# Altium PCB PCB1.PcbDoc (part 2 of 2)
Units mm, origin at the board's own origin, x right, y up, seen from the top; angles counter-clockwise.
Board outline 126.06 x 70 mm, 2 copper layers (Top Layer, Bottom Layer); 146 components, 103 nets, 443 pads, 623 vias.
Unrouted connection lines stored in the file: 85.
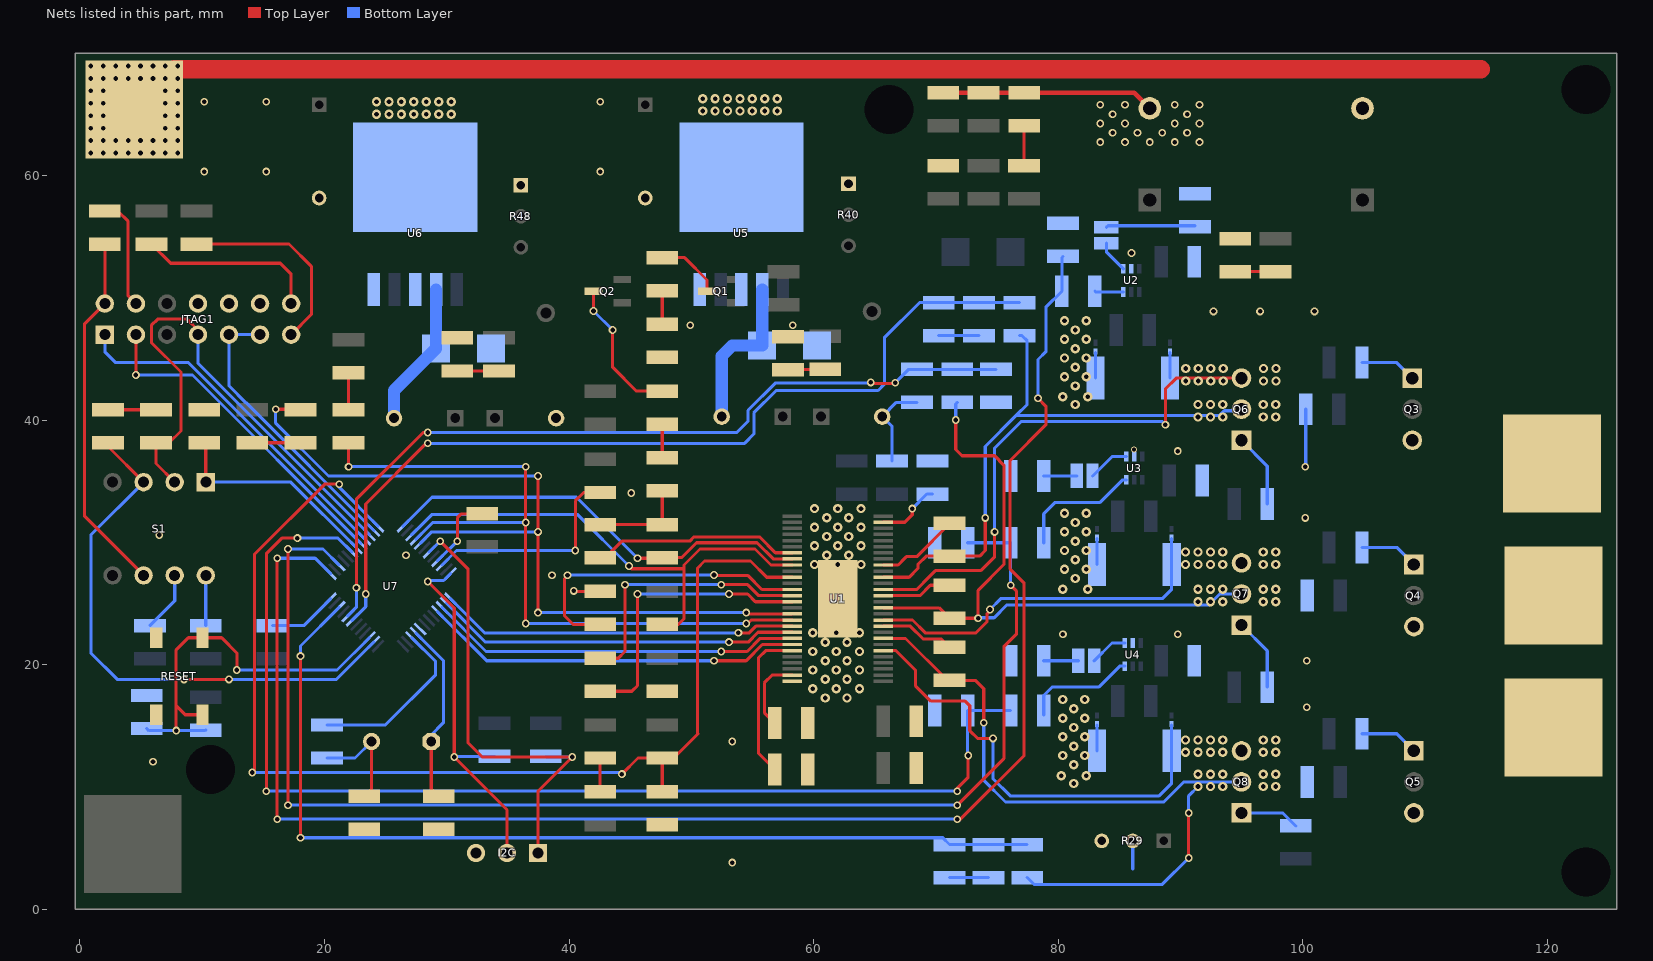
[diagram p2: the nets of this part, all layers, seen from the top]

## Via types
v1: diameter 0.762, hole 0.381, Top Layer to Bottom Layer, 368 vias
v2: diameter 0.635, hole 0.381, Top Layer to Bottom Layer, 254 vias
v3: diameter 0.5, hole 0.3, Top Layer to Bottom Layer, 1 vias

## Nets (pads, with @x,y where several pads share a name; then routed paths per layer and width w, separated by ;. In a path a pad name is that pad's centre, name@x,y a point inside that pad or via, vN(x,y) a via of type N, cw(c..) or ccw(c..) an arc to the next point about the centre after c; other vN are vias at no path point) (continued)
GND: C1.2 C2.2 C4.2 C8.2 C9.2 C10.2 C11.2 C12.2 C13.2 C17.2 C18.1 C19.1 C20.2 C21.1 C22.1 C23.1 C24.2 C25.1 C26.2 C27.2 C28.2 C29.2 C30.2 C31.2 C32.2 C33.2 C34.2 C35.2 C36.1 C37.1 C38.2 C39.1 D3.1 D4.2 D6.2 D7.1 D8.2 GND.1 I2C.3 J4.2 J5.2 J6.2 JTAG1.4 JTAG1.8 JTAG1.10 JTAG1.12 R1.1 R4.1 R5.1 R6.1 R7.1 R8.2 R13.1 R14.1 R15.1 R22.1 R23.1 R24.1 R26.1 R27.1 R29.3 R31.1 R32.1 R34.1 R37.1 R40.1 R41.2 R42.1 R43.1 R44.1 R48.1 R53.1 RESET.1 RESET.2 U1.28 U1.57 U2.2 U3.2 U4.2 U5.3 U5.5 U5.6 U6.3 U6.5 U6.6 U7.12 U7.33 U7.44 | length 191.8
  Top Layer w0.254: R41.2@2.032,57.103 3.095,57.103 3.937,56.261 3.937,50.165 JTAG1.4@4.572,49.53 ; R44.1@2.286,40.847 R43.1@6.223,40.847 ; v2(30.861,30.099) 30.861,32.004 31.195,32.338 C38.2@32.893,32.338 ; v2(40.386,26.035) 40.433,25.988 C4.2@42.545,25.988 ; R7.1@42.545,9.605 R6.1@42.545,12.366 ; R5.1@42.545,31.449 R13.1@47.625,31.449 R4.1@47.625,34.21
  Top Layer w0.381: C33.2@70.603,66.786 C32.2@73.905,66.786 C34.2@77.232,66.786 86.211,66.786 C30.2@87.494,65.503
  Top Layer w1.5: GND.1@4.445,65.405 7.747,68.707 114.554,68.707
  Bottom Layer w0.254: C35.2@15.748,23.194 18.299,23.194 U7.12@20.497,25.392 ; U7.33@29.244,28.499 30.843,30.099 v2(30.861,30.099) ; C10.2@66.421,36.656 66.421,39.479 C27.2@65.61,40.29 66.769,41.449 C20.2@68.453,41.449 ; C17.2@70.231,46.91 R26.1@73.533,46.91 ; C24.2@71.12,2.587 R37.1@74.295,2.587 ; R22.1@83.056,43.434 J4.2@83.056,45.54 ; R24.1@83.183,12.954 J6.2@83.183,15.06 ; R23.1@83.183,28.194 J5.2@83.183,30.3 ; v2(100.203,36.195) 100.25,36.148 C11.2@100.25,40.894
  other v1: 81.28,10.287 80.264,10.922 82.296,10.922 81.28,11.811 80.391,12.573 82.169,12.573 81.28,13.335 80.391,14.097 82.169,14.097 81.28,14.859 80.391,15.621 82.169,15.621 81.28,16.383 80.391,17.145 82.169,17.145 60.96,17.272 62.738,17.272 59.944,18.034 61.849,18.034 63.754,18.034 60.96,18.796 62.738,18.796 59.944,19.558 61.849,19.558 63.754,19.558 60.96,20.32 62.738,20.32 59.944,21.082 61.849,21.082 63.754,21.082 60.96,21.844 62.738,21.844 59.944,22.606 61.849,22.606 63.754,22.606 80.391,26.162 82.423,26.162 81.407,27.051 80.518,27.813 82.296,27.813 60.071,28.194 61.976,28.194 63.881,28.194 81.407,28.575 61.087,28.956 62.865,28.956 80.518,29.337 82.296,29.337 60.071,29.718 61.976,29.718 63.881,29.718 81.407,30.099 61.087,30.48 62.865,30.48 80.518,30.861 82.296,30.861 60.071,31.242 61.976,31.242 63.881,31.242 81.407,31.623 61.087,32.004 62.865,32.004 80.518,32.385 82.296,32.385 60.071,32.766 61.976,32.766 63.881,32.766 81.407,41.275 80.391,41.91 82.423,41.91 81.407,42.799 80.518,43.561 82.296,43.561 81.407,44.323 80.518,45.085 82.296,45.085 81.407,45.847 80.518,46.609 82.296,46.609 81.407,47.371 80.518,48.133 82.296,48.133 0.889,61.849 1.905,61.849 2.921,61.849 3.937,61.849 4.953,61.849 5.969,61.849 6.985,61.849 8.001,61.849 0.889,62.865 1.905,62.865 2.921,62.865 3.937,62.865 4.953,62.865 5.969,62.865 6.985,62.865 8.001,62.865 0.889,63.881 1.905,63.881 6.985,63.881 8.001,63.881 0.889,64.897 1.905,64.897 6.985,64.897 8.001,64.897 24.257,65.024 25.273,65.024 26.289,65.024 27.305,65.024 28.321,65.024 29.337,65.024 30.353,65.024 50.927,65.278 51.943,65.278 52.959,65.278 53.975,65.278 54.991,65.278 56.007,65.278 57.023,65.278 0.889,65.913 1.905,65.913 6.985,65.913 8.001,65.913 24.257,66.04 25.273,66.04 26.289,66.04 27.305,66.04 28.321,66.04 29.337,66.04 30.353,66.04 50.927,66.294 51.943,66.294 52.959,66.294 53.975,66.294 54.991,66.294 56.007,66.294 57.023,66.294 0.889,66.929 1.905,66.929 6.985,66.929 8.001,66.929 0.889,67.945 1.905,67.945 2.921,67.945 3.937,67.945 4.953,67.945 5.969,67.945 6.985,67.945 8.001,67.945 0.889,68.961 1.905,68.961 2.921,68.961 3.937,68.961 4.953,68.961 5.969,68.961 6.985,68.961 8.001,68.961
  other v2: 53.34,3.81 5.969,12.065 53.34,13.716 100.33,16.51 100.33,20.32 80.391,22.479 89.789,22.479 38.608,27.305 26.67,28.956 6.477,30.607 100.203,32.004 45.085,34.036 89.789,37.465 49.911,47.752 58.293,47.752 92.71,48.895 96.52,48.895 100.965,48.895 86.004,53.67 10.16,60.325 15.24,60.325 42.545,60.325 83.439,62.738 85.471,62.738 87.503,62.738 89.535,62.738 91.567,62.738 84.455,63.5 86.487,63.5 88.519,63.5 90.551,63.5 83.439,64.262 85.471,64.262 89.535,64.262 91.567,64.262 84.455,65.024 90.551,65.024 83.439,65.786 85.471,65.786 89.535,65.786 91.567,65.786 10.16,66.04 15.24,66.04 42.545,66.04
  other v3: 86.208,37.592
GPIO0: GPIO2.2 U1.17 U7.29 | length 68.5
  Top Layer w0.254: v2(16.002,40.894) 17.987,40.894 GPIO2.2@18.034,40.847 ; v2(37.465,24.257) v2(37.465,30.861) v2(37.465,35.433) ; v2(54.483,24.257) 54.582,24.158 U1.17@58.248,24.158
  Bottom Layer w0.254: v2(16.002,40.894) 16.002,39.751 20.32,35.433 v2(37.465,35.433) ; U7.29@27.825,29.918 28.767,30.861 v2(37.465,30.861) ; v2(37.465,24.257) v2(54.483,24.257)
GPIO1: GPIO1.2 U1.18 U7.28 | length 60.6
  Top Layer w0.254: v2(21.971,36.195) GPIO1.2@21.971,38.147 ; v2(36.449,23.368) v2(36.449,31.623) v2(36.449,36.195) ; v2@54.61,23.368 54.892,23.65 U1.18@58.256,23.65
  Bottom Layer w0.254: v2(21.971,36.195) v2(36.449,36.195) ; U7.28@27.483,30.26 28.847,31.623 v2(36.449,31.623) ; v2(36.449,23.368) v2(54.483,23.368)
GPIO34: R42.2 S1.1 U7.19 | length 17.8
  Top Layer w0.254: R42.2@10.16,38.147 10.287,38.02 S1.1@10.287,34.925
  Bottom Layer w0.254: S1.1@10.287,34.925 17.25,34.925 U7.19@22.616,29.559
JTAG_TRST: JTAG1.2 R41.1 S1.6 | length 29.8
  Top Layer w0.254: R41.1@2.032,54.403 JTAG1.2@2.032,49.53 0.381,47.879 0.381,32.131 S1.6@5.207,27.305
M_OC/SDI: R9.1 U1.9 U7.27 | length 41.1
  Top Layer w0.254: v2(44.9,28.067) 45.12,27.847 49.369,27.847 49.403,27.813 ; R9.1@47.625,23.288 48.942,23.288 49.403,23.749 49.403,27.813 ; U1.9@58.256,28.15 56.516,28.15 55.202,29.464 50.715,29.464 49.403,28.152 49.403,27.813
  Bottom Layer w0.254: U7.27@27.124,30.619 28.798,32.293 40.675,32.293 v2(44.9,28.067)
M_PWM/\SCS: R13.2 U1.8 U7.25 | length 36
  Top Layer w0.254: v2(45.593,28.702) 47.578,28.702 R13.2@47.625,28.749 49.196,28.749 50.419,29.972 55.372,29.972 56.694,28.65 U1.8@58.256,28.65
  Bottom Layer w0.254: U7.25@26.424,31.319 28.794,33.69 40.605,33.69 v2(45.593,28.702)
NetC3_1: C3.1 U1.14 | length 21.8
  Top Layer w0.254: C3.1@42.545,20.527 44.022,20.527 44.577,21.082 v2@44.577,26.289 ; v2@44.577,26.416 v2(44.577,26.543) ; v2(52.451,26.543) 54.61,26.543 55.503,25.65 U1.14@58.256,25.65
  Bottom Layer w0.254: v2@44.577,26.416 v2(44.577,26.543) v2(52.451,26.543)
NetC3_2: C3.2 U1.15 | length 23.7
  Top Layer w0.254: C3.2@42.545,17.827 45.132,17.827 45.593,18.288 v2(45.593,25.781) ; v2(53.086,25.781) 54.61,25.781 55.241,25.15 U1.15@58.256,25.15
  Bottom Layer w0.254: v2(45.593,25.781) v2(53.086,25.781)
NetC4_1: C4.1 U1.13 | length 25.5
  Top Layer w0.254: v2(39.878,27.305) 39.624,27.051 39.624,24.003 40.339,23.288 C4.1@42.545,23.288 ; v2(51.85,27.329) 51.874,27.305 54.61,27.305 55.765,26.15 U1.13@58.256,26.15
  Bottom Layer w0.254: v2@39.902,27.329 v2(51.85,27.329)
NetC5_1: C5.1 U1.48 | length 6.9
  Top Layer w0.254: U1.48@65.696,28.15 66.91,28.15 67.199,28.439 67.199,28.446 67.591,28.838 68.437,28.838 71.12,31.521 C5.1@71.12,31.576
NetC6_1: C6.1 U1.43 | length 5.8
  Top Layer w0.254: U1.43@65.696,25.65 68.703,25.65 69.549,26.496 C6.1@71.12,26.496
NetC7_1: C7.1 U1.38 | length 6.1
  Top Layer w0.254: U1.38@65.696,23.15 67.909,23.15 68.961,22.098 70.438,22.098 C7.1@71.12,21.416
NetC8_1: C8.1 U1.27 | length 6.2
  Top Layer w0.254: C8.1@56.816,15.24 55.978,16.078 55.978,18.513 56.615,19.15 U1.27@58.256,19.15
NetC9_1: C9.1 U1.23 | length 12.7
  Top Layer w0.254: C9.1@56.816,11.43 55.499,12.747 55.499,20.574 56.075,21.15 U1.23@58.256,21.15
NetC18_2: C18.2 R28.1 U7.13 | length 133.2
  Top Layer w0.254: v2(16.129,7.366) v2(16.129,28.702) ; v2(71.755,7.366) 71.882,7.239 77.216,12.573 77.216,26.67 76.073,27.813 76.073,36.703 78.994,39.624 78.994,41.148 v2(78.359,41.783)
  Bottom Layer w0.254: v2(16.129,7.366) v2(71.755,7.366) ; v2(16.129,28.702) 19.235,28.702 U7.13@20.497,27.44 ; v2(78.359,41.783) 78.359,44.958 78.994,45.593 78.994,49.229 R28.1@80.311,50.546 80.311,53.307 C18.2@80.391,53.387
NetC21_2: C21.2 R33.1 U7.15 | length 107.6
  Top Layer w0.254: v2(17.018,8.509) v2(17.018,29.464) ; v2(71.755,8.509) 75.565,12.319 75.565,21.463 76.581,22.479 76.581,26.035 v2(76.12,26.496)
  Bottom Layer w0.254: v2(17.018,8.509) v2(71.755,8.509) ; v2(17.018,29.464) 19.873,29.464 U7.15@21.197,28.14 ; C21.2@72.597,29.972 R33.1@76.12,29.972 v2(76.12,26.496)
NetC23_2: C23.2 R36.1 U7.18 | length 94.6
  Top Layer w0.254: v2(15.24,9.652) 15.24,29.083 16.51,30.353 v2(17.78,30.353) ; v2(71.755,9.652) 71.628,9.779 72.644,10.795 v2(72.644,12.573)
  Bottom Layer w0.254: v2(15.24,9.652) v2(71.755,9.652) ; v2(17.78,30.353) 21.104,30.353 U7.18@22.257,29.2 ; v2(72.644,12.573) 72.597,12.62 C23.2@72.597,16.256 R36.1@76.12,16.256
NetC34_1: C34.1 R51.1 | length 3.2
  Top Layer w0.254: R51.1@77.207,60.817 C34.1@77.207,64.061
NetC36_2: C36.2 R54.2 Y1.2 | length 9
  Top Layer w0.254: C36.2@23.241,9.224 23.849,9.832 Y1.2@23.849,13.716
  Bottom Layer w0.254: R54.2@20.193,12.366 22.499,12.366 Y1.2@23.849,13.716
NetD1_1: D1.1 R1.2 | length 2.8
  Top Layer w0.254: R1.2@47.625,47.832 D1.1@47.625,50.593
NetD1_2: D1.2 Q1.3 | length 5.3
  Top Layer w0.254: D1.2@47.625,53.293 49.45,53.293 51.276,51.467 Q1.3@51.276,50.546
NetD2_1: D2.1 R4.2 | length 2.8
  Top Layer w0.254: R4.2@47.625,36.91 D2.1@47.625,39.671
NetD2_2: D2.2 Q2.3 | length 11.7
  Top Layer w0.254: v2(42.005,48.927) Q2.3@42.005,50.546 ; v2(43.561,47.371) 43.561,44.323 45.513,42.371 D2.2@47.625,42.371
  Bottom Layer w0.254: v2(42.005,48.927) v2(43.561,47.371)
NetD3_2: D3.2 L1.2 U5.2 | length 13.2
  Bottom Layer w1: L1.2@52.482,40.29 52.482,45.243 53.34,46.101 D3.2@55.789,46.101 ; D3.2@55.795,46.107 U5.2@55.795,50.679
NetD4_1: D4.1 R47.1 | length 3.4
  Top Layer w0.254: D4.1@57.522,44.147 R47.1@60.951,44.147
NetD6_1: D6.1 R49.1 | length 3.3
  Top Layer w0.254: D6.1@94.479,52.148 R49.1@97.781,52.148
NetD7_2: D7.2 L2.2 U6.2 | length 11.9
  Bottom Layer w1: L2.2@25.685,40.163 25.685,42.413 D7.2@29.119,45.847 29.125,45.853 U6.2@29.125,50.679
NetD8_1: D8.1 R52.1 | length 3.4
  Top Layer w0.254: D8.1@30.852,44.02 R52.1@34.281,44.02
NetD9_1: GPIO2.1 R57.1 | length 3.9
  Top Layer w0.254: R57.1@14.097,38.147 GPIO2.1@18.034,38.147
NetD10_1: GPIO1.1 R58.1 | length 3
  Top Layer w0.254: GPIO1.1@21.971,40.847 R58.1@21.971,43.862
NetI2C_1: I2C.1 R12.1 U7.31 | length 38.9
  Top Layer w0.254: v2(29.464,30.099) 31.75,27.813 31.75,13.589 32.893,12.446 v2(40.259,12.446) 37.465,9.652 I2C.1@37.465,4.597
  Bottom Layer w0.254: U7.31@28.543,29.2 29.442,30.099 v2(29.464,30.099) ; R12.1@38.1,12.493 38.147,12.446 v2(40.259,12.446)
NetI2C_2: I2C.2 R59.1 U7.36 | length 30.3
  Top Layer w0.254: v2(28.448,26.797) 30.607,24.638 v2(30.607,12.446) 34.925,8.128 I2C.2@34.925,4.597
  Bottom Layer w0.254: v2(28.448,26.797) 28.532,26.881 29.745,26.881 U7.36@30.303,27.44 ; v2(30.607,12.446) 30.654,12.493 R59.1@33.909,12.493
NetJ7_1: J7.1 R27.2 | length 7.3
  Bottom Layer w0.254: J7.1@83.947,55.768 84.074,55.895 R27.2@91.186,55.895
NetJ7_2: J7.2 U2.1 | length 2.7
  Bottom Layer w0.254: J7.2@83.947,54.468 83.947,53.767 U2.1@85.329,52.385
NetJ8_1: J8.1 R32.2 | length 2.7
  Bottom Layer w0.254: R32.2@78.82,35.433 J8.1@81.519,35.433
NetJ8_2: J8.2 U3.1 | length 3.4
  Bottom Layer w0.254: J8.2@82.819,35.433 84.404,37.018 U3.1@85.583,37.018
NetJ9_1: J9.1 R34.2 | length 2.8
  Bottom Layer w0.254: R34.2@78.82,20.32 J9.1@81.646,20.32
NetJ9_2: J9.2 U4.1 | length 3.1
  Bottom Layer w0.254: J9.2@82.946,20.32 84.404,21.778 U4.1@85.456,21.778
NetJTAG1_13: JTAG1.13 R45.2 | length 16.4
  Top Layer w0.254: R45.2@9.525,54.403 17.098,54.403 18.923,52.578 18.923,48.641 JTAG1.13@17.272,46.99
NetJTAG1_14: JTAG1.14 R46.2 | length 14.9
  Top Layer w0.254: R46.2@5.842,54.403 7.413,52.832 16.383,52.832 17.272,51.943 JTAG1.14@17.272,49.53
NetQ3_1: Q3.1 R16.2 | length 4.6
  Bottom Layer w0.254: R16.2@104.855,44.704 107.696,44.704 Q3.1@108.966,43.434
NetQ4_1: Q4.1 R17.2 | length 4.8
  Bottom Layer w0.254: R17.2@104.855,29.591 107.696,29.591 Q4.1@109.093,28.194
NetQ5_1: Q5.1 R18.2 | length 4.8
  Bottom Layer w0.254: R18.2@104.855,14.351 107.696,14.351 Q5.1@109.093,12.954
NetQ6_1: Q6.1 R19.2 | length 6.1
  Bottom Layer w0.254: Q6.1@94.996,38.354 97.108,36.242 R19.2@97.108,33.147
NetQ7_1: Q7.1 R20.2 | length 6
  Bottom Layer w0.254: Q7.1@94.996,23.241 97.108,21.129 R20.2@97.108,18.161
NetQ8_1: Q8.1 R21.2 | length 4.9
  Bottom Layer w0.254: Q8.1@94.996,7.874 98.378,7.874 R21.2@99.441,6.811
NetR5_2: R5.2 U1.7 | length 17
  Top Layer w0.254: R5.2@42.545,28.749 42.973,28.749 44.323,30.099 49.869,30.099 50.221,30.451 55.57,30.451 56.871,29.15 U1.7@58.256,29.15
NetR8_1: R8.1 U1.55 | length 5.3
  Top Layer w0.254: U1.55@65.696,31.65 67.464,31.65 68.072,32.258 v2(68.072,32.766)
  Bottom Layer w0.254: v2(68.072,32.766) 69.262,33.956 R8.1@69.723,33.956
NetR28_2: R28.2 U2.6 | length 2.3
  Bottom Layer w0.254: R28.2@83.011,50.546 83.072,50.485 U2.6@85.329,50.485
NetR33_2: R33.2 U3.6 | length 10.3
  Bottom Layer w0.254: R33.2@78.82,29.972 78.82,32.338 79.756,33.274 83.439,33.274 85.283,35.118 U3.6@85.583,35.118
NetR36_2: R36.2 U4.6 | length 9.2
  Bottom Layer w0.254: R36.2@78.82,15.875 78.82,17.479 79.502,18.161 83.312,18.161 85.029,19.878 U4.6@85.456,19.878
NetR38_2: R38.2 S1.8 | length 4.1
  Bottom Layer w0.254: R38.2@10.287,23.194 S1.8@10.287,27.305
NetR39_2: R39.2 S1.7 | length 5
  Bottom Layer w0.254: R39.2@5.715,23.194 7.747,25.226 S1.7@7.747,27.305
NetR54_1: R54.1 U7.46 | length 14.4
  Bottom Layer w0.254: R54.1@20.193,15.066 24.972,15.066 29.083,19.177 29.083,20.254 U7.46@27.124,22.213
NetR56_2: R56.2 U7.34 | length 17.8
  Top Layer w0.254: v2(40.513,29.337) 40.513,33.401 41.195,34.083 R56.2@42.545,34.083
  Bottom Layer w0.254: U7.34@29.603,28.14 30.8,29.337 v2(40.513,29.337)
OC_ADJ/SCLK: R11.2 R15.2 U1.11 U7.24 | length 94.8
  Top Layer w0.254: v2(14.097,11.176) 14.259,11.338 14.259,29.016 20.006,34.764 v2(21.196,34.764) ; v2(44.323,11.049) 45.64,12.366 R11.2@47.625,12.366 ; R15.2@47.625,9.605 R11.2@47.625,12.366 ; U1.11@58.256,27.15 56.162,27.15 54.835,28.477 51.083,28.477 50.511,27.905 50.511,14.386 50.546,14.351 48.561,12.366 R11.2@47.625,12.366
  Bottom Layer w0.254: v2(14.097,11.176) 44.323,11.176 v2(44.323,11.049) ; v2(21.196,34.764) 21.196,34.499 U7.24@24.376,31.319
PWM_BH: U1.19 U7.37 | length 29.3
  Top Layer w0.254: v2(53.848,22.606) 54.737,22.606 55.281,23.15 U1.19@58.256,23.15
  Bottom Layer w0.254: U7.37@30.303,25.392 33.089,22.606 v2(53.848,22.606)
PWM_BL: U1.20 U7.38 | length 30
  Top Layer w0.254: v2(53.086,21.844) 54.652,21.844 55.458,22.65 U1.20@58.256,22.65
  Bottom Layer w0.254: U7.38@29.962,25.051 33.169,21.844 v2(53.086,21.844)
PWM_CH: U1.21 U7.39 | length 30.6
  Top Layer w0.254: v2(52.451,21.082) 54.568,21.082 55.636,22.15 U1.21@58.256,22.15
  Bottom Layer w0.254: U7.39@29.603,24.692 33.213,21.082 v2(52.451,21.082)
PWM_CL: U1.22 U7.40 | length 31.2
  Top Layer w0.254: v2(51.85,20.32) 54.483,20.32 55.813,21.65 U1.22@58.256,21.65
  Bottom Layer w0.254: U7.40@29.244,24.333 33.256,20.32 v2(51.85,20.32)
R\E\S\E\T\: C39.2 R55.1 RESET.3 RESET.4 U7.3 | length 33.2
  Top Layer w0.254: v2@7.839,14.64 7.839,16.672 ; RESET.4@10.028,15.9 8.611,15.9 7.839,16.672 ; v2(12.827,19.558) 12.827,20.955 11.582,22.2 RESET.3@10.028,22.2 8.865,22.2 7.839,21.174 7.839,16.672
  Bottom Layer w0.254: C39.2@5.461,14.779 5.635,14.605 v2(7.874,14.605) 10.24,14.605 R55.1@10.287,14.652 ; v2(12.827,19.558) 21.021,19.558 U7.3@23.676,22.213
REF_CS: pad.0@86.106,3.302 R29.2 | length 2.3
  Bottom Layer w0.254: pad.0@86.106,3.302 R29.2@86.106,5.588
SH_A: A.1 C5.2 Q3.3 Q6.2 R25.1 U1.46 | length 47.3
  Top Layer w0.254: U1.46@65.696,27.15 67.815,27.15 68.545,27.88 68.545,28.217 69.204,28.876 C5.2@71.12,28.876 73.58,28.876 74.041,29.337 v2(74.041,32.004)
  Bottom Layer w0.254: v2(74.041,32.004) 74.041,37.846 76.581,40.386 ; R25.1@76.835,46.91 77.042,46.91 77.47,46.482 77.47,41.275 76.581,40.386 ; Q6.2@94.869,40.767 93.599,40.767 93.218,40.386 76.581,40.386
  other v1: 91.44,40.259 92.456,40.259 93.472,40.259 96.774,40.259 97.79,40.259 91.44,41.275 92.456,41.275 93.472,41.275 96.774,41.275 97.79,41.275
SH_B: B.1 C6.2 Q4.3 Q7.2 R30.1 U1.41 | length 52.2
  Top Layer w0.254: U1.41@65.696,24.65 70.266,24.65 C6.2@71.12,23.796 v2(73.453,23.796) 73.453,26.082 75.565,28.194 75.565,36.322 74.803,37.084 72.136,37.084 71.628,37.592 v2(71.628,40.005)
  Bottom Layer w0.254: v2(71.628,40.005) 71.628,41.322 R30.1@71.755,41.449 ; v2(73.453,23.796) 73.498,23.841 74.768,23.841 75.819,24.892 92.329,24.892 93.218,25.781 Q7.2@94.996,25.781
  other v1: 91.44,25.146 92.456,25.146 93.472,25.146 96.774,25.146 97.79,25.146 91.44,26.162 92.456,26.162 93.472,26.162 96.774,26.162 97.79,26.162
SH_C: C7.2 C.1 Q5.3 Q8.2 R35.1 U1.36 | length 60.4
  Top Layer w0.254: U1.36@65.696,22.15 65.704,22.142 67.52,22.142 70.946,18.716 C7.2@71.12,18.716 73.232,18.716 73.914,18.034 v2(73.914,15.24) ; v2(90.678,4.191) v2(90.678,7.874)
  Bottom Layer w0.254: v2(73.914,15.24) 73.914,10.541 75.692,8.763 88.646,8.763 90.297,10.414 Q8.2@94.996,10.414 ; R35.1@77.47,2.587 78.025,2.032 88.519,2.032 v2(90.678,4.191) ; v2(90.678,7.874) 90.678,9.271 v1(91.44,10.033)
  other v1: 92.456,10.033 93.472,10.033 96.774,10.033 97.79,10.033 91.44,11.049 92.456,11.049 93.472,11.049 96.774,11.049 97.79,11.049
SL_A: J1.2 Q6.3 R22.2 U1.44 | length 45.7
  Top Layer w0.254: U1.44@65.696,26.15 68.441,26.15 69.468,27.177 69.468,27.192 69.962,27.686 73.66,27.686 74.803,28.829 v2(74.803,30.861) ; v2(88.773,39.624) 88.773,42.545 89.662,43.434 Q6.3@94.996,43.434
  Bottom Layer w0.254: v2(74.803,30.861) 74.803,37.719 76.962,39.878 88.519,39.878 v2(88.773,39.624) ; R22.2@89.156,43.434 J1.2@89.156,45.54
  other v1: 90.451,43.207 91.467,43.207 92.483,43.207 93.499,43.207 96.801,43.207 97.817,43.207 90.451,44.223 91.467,44.223 92.483,44.223 93.499,44.223 96.801,44.223 97.817,44.223
SL_B: J2.2 Q7.3 R23.2 U1.39 | length 30.1
  Top Layer w0.254: U1.39@65.696,23.65 68.086,23.65 69.13,22.606 73.279,22.606 74.168,23.495 74.168,24.13 74.422,24.384 v2(74.422,24.511)
  Bottom Layer w0.254: v2(74.422,24.511) 75.311,25.4 88.519,25.4 89.283,26.164 R23.2@89.283,28.194 J2.2@89.283,30.3
  other v1: 90.424,28.194 91.44,28.194 92.456,28.194 93.472,28.194 96.774,28.194 97.79,28.194 90.424,29.21 91.44,29.21 92.456,29.21 93.472,29.21 96.774,29.21 97.79,29.21
SL_C: J3.2 Q8.3 R24.2 U1.34 | length 37.6
  Top Layer w0.254: U1.34@65.696,21.15 66.734,21.15 68.326,19.558 68.326,18.288 69.596,17.018 72.39,17.018 72.771,16.637 72.771,14.605 73.406,13.97 v2(74.676,13.97)
  Bottom Layer w0.254: v2(74.676,13.97) 74.676,10.668 76.073,9.271 88.265,9.271 89.283,10.289 R24.2@89.283,12.954 J3.2@89.283,15.06
  other v1: 90.424,12.827 91.44,12.827 92.456,12.827 93.472,12.827 96.774,12.827 97.79,12.827 90.424,13.843 91.44,13.843 92.456,13.843 93.472,13.843 96.774,13.843 97.79,13.843
TCK: JTAG1.9 JTAG1.11 U7.23 | length 23.5
  Bottom Layer w0.254: JTAG1.11@14.732,46.99 JTAG1.9@12.192,46.99 12.192,42.799 13.567,41.424 13.589,41.424 U7.23@24.035,30.978
TDI: JTAG1.3 U7.20 | length 27.4
  Top Layer w0.254: v2(4.572,43.688) JTAG1.3@4.572,46.99
  Bottom Layer w0.254: v2(4.572,43.688) 9.206,43.688 U7.20@22.975,29.918
TDO: JTAG1.7 R43.2 S1.2 U7.22 | length 42.9
  Top Layer w0.254: S1.2@7.747,34.925 6.223,36.449 R43.2@6.223,38.147 7.286,38.147 8.255,39.116 8.255,43.942 5.842,46.355 5.842,47.752 6.35,48.26 8.763,48.26 9.652,47.371 JTAG1.7@9.652,46.99
  Bottom Layer w0.254: 9.652,44.643 U7.22@23.676,30.619 ; 9.652,44.653 JTAG1.7@9.652,46.99
TMS: JTAG1.1 U7.21 | length 29
  Bottom Layer w0.254: JTAG1.1@2.032,46.99 2.032,45.593 2.921,44.704 8.872,44.704 U7.21@23.317,30.26
TRST: R44.2 S1.3 U7.2 | length 45.5
  Top Layer w0.254: R44.2@2.286,38.147 2.286,37.846 S1.3@5.207,34.925 ; v2(8.509,18.796) v2(12.192,18.796)
  Bottom Layer w0.254: S1.3@5.207,34.925 0.889,30.607 0.889,20.955 3.048,18.796 v2(8.509,18.796) ; v2(12.192,18.796) 20.977,18.796 U7.2@24.035,21.854
VA_FB: C17.1 R25.2 R26.2 U7.7 | length 73.5
  Top Layer w0.254: v2(23.368,25.781) 23.368,33.147 28.321,38.1 v2(28.448,38.1)
  Bottom Layer w0.254: U7.7@22.257,23.632 23.368,24.743 v2(23.368,25.781) ; v2(28.448,38.1) 54.356,38.1 55.118,38.862 55.118,40.598 56.938,42.418 65.278,42.418 65.786,42.926 65.786,46.736 68.66,49.61 C17.1@70.231,49.61 R26.2@73.533,49.61 R25.2@76.835,49.61
VB_FB: C20.1 R30.2 R31.2 U7.8 | length 67.2
  Top Layer w0.254: v2(22.606,26.289) 22.606,33.528 28.067,38.989 v2(28.448,38.989) ; v2(64.677,43.087) 64.677,42.99 66.612,42.99 v2(66.675,43.053)
  Bottom Layer w0.254: U7.8@21.898,23.991 22.606,24.7 v2(22.606,26.289) ; v2(28.448,38.989) 53.721,38.989 54.639,39.907 54.639,40.796 56.896,43.053 64.643,43.053 v2(64.677,43.087) ; v2(66.675,43.053) 67.771,44.149 C20.1@68.453,44.149 R30.2@71.755,44.149 R31.2@74.93,44.149
VC_FB: C24.1 R35.2 R37.2 U7.10 | length 79.8
  Top Layer w0.254: v2(18.034,5.842) v2(18.034,20.701)
  Bottom Layer w0.254: v2(18.034,5.842) 70.565,5.842 C24.1@71.12,5.287 R37.2@74.295,5.287 R35.2@77.47,5.287 ; v2(18.034,20.701) 18.034,21.529 U7.10@21.197,24.692
X1: C37.2 U7.45 Y1.1 | length 14.9
  Top Layer w0.254: Y1.1@28.729,13.716 28.729,9.832 C37.2@29.337,9.224
  Bottom Layer w0.254: U7.45@27.483,22.572 29.718,20.338 29.718,15.24 28.729,14.251 Y1.1@28.729,13.716
pads on no net: JTAG1.6 S1.4 S1.5 U1.1 U1.2 U1.3 U1.4 U1.24 U1.25 U1.26 U1.30 U1.31 U1.32 U1.33 U1.50 U1.51 U1.52 U1.53 U1.54 U1.56 U7.4 U7.5 U7.9 U7.14 U7.16 U7.17 U7.30 U7.47

## Polygon pours and split planes (outlines as drawn)
+PVDD on Top Layer "Bottom Layer-No Net" (solid, pour order 46): 65.684,4.318 63.627,2.261 67.615,2.261
GND on Top Layer "Bottom Layer-No Net" (solid, pour order 42): 78.74,46.355 78.74,3.81 102.235,3.81 102.235,69.469 78.74,69.469
+PVDD on Top Layer "Bottom Layer-No Net" (solid, remove dead copper, pour order 35): 103.632,9.271 103.632,0.635 125.095,0.635 125.095,8.255 125.095,10.033 124.989,10.139 103.632,10.139
SH_C on Top Layer "Bottom Layer-No Net" (solid, remove dead copper, pour order 53): 125.222,10.033 124.714,9.525 120.777,9.525 116.332,5.08 103.124,5.08 102.489,5.08 98.298,9.271 93.726,9.271 93.726,11.684 98.298,11.684 98.425,11.684 106.299,19.558 115.697,19.558
SH_A on Top Layer "Bottom Layer-No Net" (solid, remove dead copper, pour order 39): 115.697,41.148 113.792,39.243 107.061,39.243 103.124,39.243 102.616,39.751 102.489,39.878 102.489,41.275 102.489,41.402 101.981,41.91 90.297,41.91 90.297,39.751 97.79,39.751 98.298,39.751 98.806,39.243 106.426,31.623 115.697,31.623
SH_A on Top Layer "Bottom Layer-No Net" (solid, remove dead copper, pour order 54): 98.298,41.91 102.743,46.355 110.363,46.355 112.141,46.355 117.348,41.148 113.538,37.338 103.886,37.338
SH_B on Top Layer "Bottom Layer-No Net" (solid, remove dead copper, pour order 43): 94.107,26.924 102.362,26.924 102.997,26.924 106.426,30.353 115.697,30.353 115.697,20.828 106.426,20.828 106.172,20.828 102.235,24.765 94.107,24.765
SH_B on Top Layer "Bottom Layer-No Net" (solid, pour order 47): 102.235,26.924 102.997,26.924 106.426,30.353
SH_B on Top Layer "Bottom Layer-No Net" (solid, pour order 48): 98.298,24.765 102.235,20.828 106.172,20.828 102.235,24.765
SH_B on Top Layer "Bottom Layer-No Net" (solid, pour order 51): 98.552,26.924 101.981,30.353 106.426,30.353 102.743,26.67
SH_A on Top Layer "Bottom Layer-No Net" (solid, pour order 52): 115.58,41.031 115.697,41.148 115.697,40.982
SH_C on Top Layer "Bottom Layer-No Net" (solid, pour order 55): 125.172,9.983 125.222,10.033 125.172,10.083
SH_A on Top Layer "Bottom Layer-No Net" (solid, pour order 56): 98.365,41.977 98.368,41.971 98.368,41.859 98.196,41.859
+PVDD on Top Layer "Bottom Layer-No Net" (solid, pour order 44): 64.897,9.779 65.659,9.017 65.706,9.017 65.786,9.017 66.548,9.779
GND on Bottom Layer "Bottom Layer-No Net" (solid, pour order 41): 78.74,46.355 78.74,3.81 102.235,3.81 102.235,69.469 78.74,69.469
+PVDD on Bottom Layer "Bottom Layer-No Net" (solid, pour order 37): 125.095,10.033 125.095,62.23 124.46,62.865 111.125,62.865 110.49,62.23 110.49,58.674 110.49,9.906
+PVDD on Bottom Layer "Bottom Layer-No Net" (solid, pour order 33): 103.632,9.271 103.632,0.635 125.095,0.635 125.095,8.255 125.095,10.033 124.989,10.139 103.632,10.139
+PVDD on Bottom Layer "Bottom Layer-No Net" (solid, remove dead copper, pour order 32): 108.077,11.43 103.632,11.43 103.632,9.271 114.427,9.271 114.808,9.652 114.808,11.684 114.808,18.034 110.617,18.034 110.617,11.684 110.363,11.43
+PVDD on Bottom Layer "Bottom Layer-No Net" (solid, remove dead copper, pour order 31): 108.077,26.67 103.632,26.67 103.632,24.511 114.427,24.511 114.808,24.892 114.808,26.924 114.808,33.274 110.617,33.274 110.617,26.924 110.363,26.67
+PVDD on Bottom Layer "Bottom Layer-No Net" (solid, remove dead copper, pour order 30): 107.95,41.91 103.505,41.91 103.505,39.751 114.3,39.751 114.681,40.132 114.681,42.164 114.681,48.514 110.49,48.514 110.49,42.164 110.236,41.91
+PVDD on Bottom Layer "Bottom Layer-No Net" (solid, pour order 34): 110.109,39.751 110.49,39.37 110.617,39.37 110.617,39.751
+PSUP on Bottom Layer "Bottom Layer-No Net" (solid, pour order 45): 32.766,68.326 32.766,67.818 34.29,66.294 36.322,68.326
+PSUP on Bottom Layer "Bottom Layer-No Net" (solid, pour order 40): 69.469,55.499 68.072,54.102 68.072,53.086 69.088,52.07 69.469,52.07
+PVDD on Bottom Layer "Bottom Layer-No Net" (solid, pour order 36): 74.549,55.372 76.107,56.93 76.109,56.93 76.109,56.86 77.597,55.372
+PVDD on Bottom Layer "Bottom Layer-No Net" (solid, pour order 38): 110.236,24.511 110.49,24.257 110.49,24.511
SH_A on Bottom Layer "Bottom Layer-No Net" (solid, pour order 29): 77.47,41.529 78.486,40.513 78.486,40.386 76.962,40.386 76.835,40.513
GND on Bottom Layer "Bottom Layer-No Net" (solid, remove dead copper, shelved, pour order 32): 0.127,69.596 0.127,0.635 7.747,0.635 125.095,0.635 125.095,5.108 125.095,69.469

## Keep-outs
Keep-Out Layer:
  circle w0.254: c10.668,11.43 r2.048
  circle w0.254: c66.167,65.405 r2.067
  circle w0.254: c123.19,3.048 r2.114
  circle w0.254: c123.182,67.056 r2.116
  lines w0.2: -0.381,0 -0.381,70 125.682,70 125.682,0 -0.381,0

## Other copper
Top Layer:
  rectangle net +PVDD: 102.616,53.086 124.714,62.738
  rectangle net GND: 68.707,67.59 78.786,68.199
  rectangle net SH_A: 90.297,39.751 98.679,41.91
  rectangle net SH_C: 96.012,9.271 98.679,11.684
  rectangle net GND: 0.127,61.087 9.017,69.596
  rectangle net +PVDD: 0,1.143 8.509,9.525
  rectangle net +PVDD: 110.871,34.671 114.173,42.799
  rectangle net +PVDD: 111.125,22.479 114.3,28.702
  rectangle net +PVDD: 110.49,9.398 114.935,17.78
  rectangle net SH_C: 122.047,9.525 124.183,9.779
  rectangle net GND: 60.306,16.51 63.627,17.412
  rectangle net GND: 59.266,17.145 64.668,23.322
  rectangle net GND: 59.309,27.432 64.643,33.782
  rectangle net GND: 59.944,21.59 64.008,28.956
  rectangle net GND: 5.207,20.828 7.112,23.368
  rectangle net GND: 64.643,39.243 66.802,41.21
  rectangle net GND: 56.104,46.012 59.212,47.62
  rectangle net GND: 21.463,5.461 31.242,7.493
  rectangle net GND: 37.853,26.748 39.236,27.893
  rectangle net GND: 37.719,38.989 40.132,41.275
  rectangle net GND: 62.002,58.293 63.881,60.194
  rectangle net GND: 82.55,4.445 84.709,6.604
  rectangle net GND: 79.502,21.717 81.026,23.036
  rectangle net GND: 89.027,21.844 90.551,23.114
  rectangle net GND: 89.154,36.703 90.424,38.1
  rectangle net GND: 85.598,36.957 86.868,38.1
  rectangle net GND: 99.568,35.433 100.838,36.83
  rectangle net GND: 92.71,54.044 96.033,55.753
  rectangle net GND: 102.743,63.754 107.188,67.056
  rectangle net GND: 85.725,63.754 89.154,66.929
  rectangle net GND: 69.342,59.563 72.263,61.976
  rectangle net GND: 68.707,65.786 78.994,67.818
  rectangle net GND: 34.671,58.166 37.465,60.325
  rectangle net GND: 46.071,44.577 49.276,45.936
  rectangle net GND: 44.45,33.274 49.403,35.179
  rectangle net GND: 46.071,30.645 49.179,32.253
  rectangle net GND: 41.148,30.458 44.174,32.385
  rectangle net GND: 41.148,24.765 43.942,26.543
  rectangle net GND: 46.071,17.018 49.022,18.631
  rectangle net GND: 45.847,5.842 49.403,7.747
  rectangle net GND: 80.137,40.386 83.439,42.926
  rectangle net GND: 79.502,25.527 83.185,33.02
  rectangle net GND: 79.248,9.525 83.185,17.907
  rectangle net GND: 79.629,42.418 83.312,49.022
  rectangle net SH_A: 89.662,39.751 90.297,41.91
  rectangle net SL_C: 88.138,11.938 98.298,14.605
  rectangle net SL_B: 88.265,27.305 98.425,29.972
  rectangle net +PVDD: 103.632,9.398 112.141,11.43
  rectangle net +PVDD: 103.632,24.638 112.141,26.67
  rectangle net +PVDD: 103.505,39.878 112.014,41.91
  rectangle net SH_A: 115.697,31.623 125.222,41.148
  rectangle net SH_B: 115.697,20.828 125.222,30.353
  rectangle net SH_C: 115.697,10.033 125.222,19.558
  rectangle net SH_A: 93.853,39.751 96.139,41.91
  rectangle net SH_A: 107.696,36.957 110.363,39.472
  rectangle net SH_B: 93.853,24.765 98.679,26.924
  rectangle net SH_B: 107.569,21.59 110.617,24.257
  rectangle net SH_B: 90.297,24.765 93.853,26.924
  rectangle net SH_C: 90.297,9.271 96.266,11.684
  rectangle net SH_C: 107.569,6.35 110.744,9.017
  rectangle net SL_A: 88.011,42.291 98.298,45.212
  rectangle net +PVDD: 64.897,9.779 66.548,18.584
  rectangle net GND: 49.15,47.117 50.8,48.607
Bottom Layer:
  rectangle net GND: 90.201,22.352 90.346,22.891
  rectangle net GND: 89.027,21.874 90.335,23.114
  rectangle net GND: 49.022,46.736 50.8,48.387
  rectangle net GND: 57.531,46.863 59.055,48.641
  rectangle net GND: 69.215,1.783 75.849,3.683
  rectangle net GND: 58.928,16.51 64.516,23.368
  rectangle net GND: 59.182,32.626 60.96,33.655
  rectangle net GND: 59.309,27.305 64.77,33.147
  rectangle net GND: 89.232,36.906 90.602,38.117
  rectangle net GND: 82.575,16.713 82.982,17.577
  rectangle net GND: 79.578,10.674 79.666,11.125
  rectangle net GND: 79.651,9.627 82.702,17.802
  rectangle net GND: 79.629,21.844 81.153,23.114
  rectangle net GND: 82.55,31.877 82.931,32.766
  rectangle net GND: 82.804,25.759 83.052,26.035
  rectangle net GND: 79.629,25.759 79.856,26.543
  rectangle net GND: 79.856,25.759 82.804,32.866
  rectangle net GND: 82.423,47.498 83.185,48.755
  rectangle net GND: 81.661,44.704 82.677,48.895
  rectangle net GND: 79.536,40.745 81.951,49.021
  rectangle net GND: 0.127,61.087 8.636,69.596
  rectangle net +PVDD: 0,1.143 8.509,9.525
  rectangle net +PVDD: 102.235,47.371 114.427,62.865
  rectangle net +PVDD: 110.49,10.414 114.808,42.926
  rectangle net GND: 102.743,64.135 106.807,66.802
  rectangle net GND: 85.725,64.008 89.154,67.056
  rectangle net GND: 44.323,33.274 45.974,34.798
  rectangle net GND: 39.751,25.4 41.275,26.67
  rectangle net GND: 37.973,26.67 39.243,27.94
  rectangle net GND: 99.492,8.814 101.422,12.04
  rectangle net GND: 99.448,23.774 101.371,27.298
  rectangle net GND: 99.492,35.408 100.914,36.957
  rectangle net GND: 99.365,39.091 101.143,42.596
  rectangle net GND: 53.188,48.899 55.034,52.426
  rectangle net GND: 49.632,48.59 51.486,52.375
  rectangle net GND: 13.97,22.39 17.302,24.13
  rectangle net GND: 78.62,55.143 82.144,56.608
  rectangle net GND: 89.357,57.379 93.243,59.436
  rectangle net GND: 90.119,51.029 92.253,54.585
  rectangle net GND: 69.706,14.702 70.701,17.81
  rectangle net GND: 75.284,18.644 77.14,21.922
  rectangle net GND: 75.316,33.879 76.924,36.987
  rectangle net GND: 70.024,28.418 70.701,31.526
  rectangle net GND: 66.899,40.513 70.053,42.253
  rectangle net GND: 73.635,40.528 76.173,42.291
  rectangle net GND: 68.555,46.106 75.087,47.854
  rectangle net GND: 64.867,35.852 71.277,37.46
  rectangle net GND: 64.338,39.091 66.675,41.224
  rectangle net GND: 58.801,44.425 62.128,47.701
  rectangle net GND: 61.874,58.166 64.11,60.223
  rectangle net GND: 37.465,39.37 40.259,41.402
  rectangle net GND: 32.004,44.069 35.433,47.498
  rectangle net GND: 23.114,48.768 24.892,52.324
  rectangle net GND: 26.661,49.078 28.185,52.279
  rectangle net GND: 35.205,58.359 36.913,60.067
  rectangle net GND: 48.514,55.149 59.427,64.77
  rectangle net GND: 21.717,55.149 32.757,64.77
  rectangle net +PVDD: 74.549,52.07 77.597,55.372
  rectangle net +PSUP: 69.469,52.07 73.025,55.499
  rectangle net GND: 81.788,41.021 84.328,45.593
  rectangle net GND: 82.423,4.445 84.709,6.223
  rectangle net GND: 81.788,10.414 84.582,14.986
  rectangle net GND: 81.788,26.035 84.328,30.353
  rectangle net SH_C: 90.297,9.398 98.552,11.557
  rectangle net SH_B: 90.805,24.638 98.298,26.797
  rectangle net SH_A: 90.17,39.751 98.298,41.91
  rectangle net SL_C: 88.138,12.065 98.298,14.732
  rectangle net SL_A: 88.011,42.164 98.298,45.212
  rectangle net SL_B: 88.265,27.051 98.552,30.099
  rectangle net +PSUP: 18.415,64.516 20.955,67.056
  rectangle net +PVDD: 107.823,39.751 110.363,41.91
  rectangle net +PVDD: 107.823,24.511 110.363,26.67
  rectangle net +PVDD: 107.95,9.271 110.236,11.43
  rectangle net +PVDD: 102.997,24.511 103.632,26.67
  rectangle net +PVDD: 103.378,9.271 103.632,11.43

## Silkscreen, mask and mechanical layers (free items; w line width, h text height)
Top Overlay:
  text "Developed at DJSCE Labs" at 120.396,41.402 h1 r90
  text "By - Jonathan Nadar" at 122.174,41.402 h1 r90
  text "TI Instaspin FOC Board (Rev 01)" at 118.491,41.148 h1.27 r90
  text "(March 2019)" at 123.952,40.513 h1 r90
Bottom Overlay:
  circle w0.254: c23.749,20.32 r0.127
  text "TMS320f28027" at 28.702,27.051 h0.64
Top Solder:
  lines w1.5: 7.54,2.112 65.706,2.112 103.378,2.112 ; 7.747,68.707 114.554,68.707

## Text inside footprints (layer, text, board x,y; h text height)
C26: Top Overlay "+" at 38.989,65.532 h1.5 r90
C27: Top Overlay "+" at 58.538,39.528 h1.5
C28: Top Overlay "+" at 12.446,65.532 h1.5 r90
C29: Top Overlay "+" at 31.89,39.413 h1.5
C30: Top Overlay "+" at 88.244,52.278 h1.5 r90
C31: Top Overlay "+" at 105.643,52.278 h1.5 r90
JTAG1: Top Overlay "13" at 16.764,44.196 h1; Top Overlay "14" at 16.637,51.308 h1; Top Overlay "1" at 1.905,44.196 h1; Top Overlay "2" at 1.651,51.308 h1